# Altium PCB MOASCT.PcbDoc
Units mm, origin at the board's own origin, x right, y up, seen from the top; angles counter-clockwise.
Board outline 85.6 x 53.98 mm, 2 copper layers (Top Layer, Bottom Layer); 55 components, 42 nets, 166 pads, 430 vias.
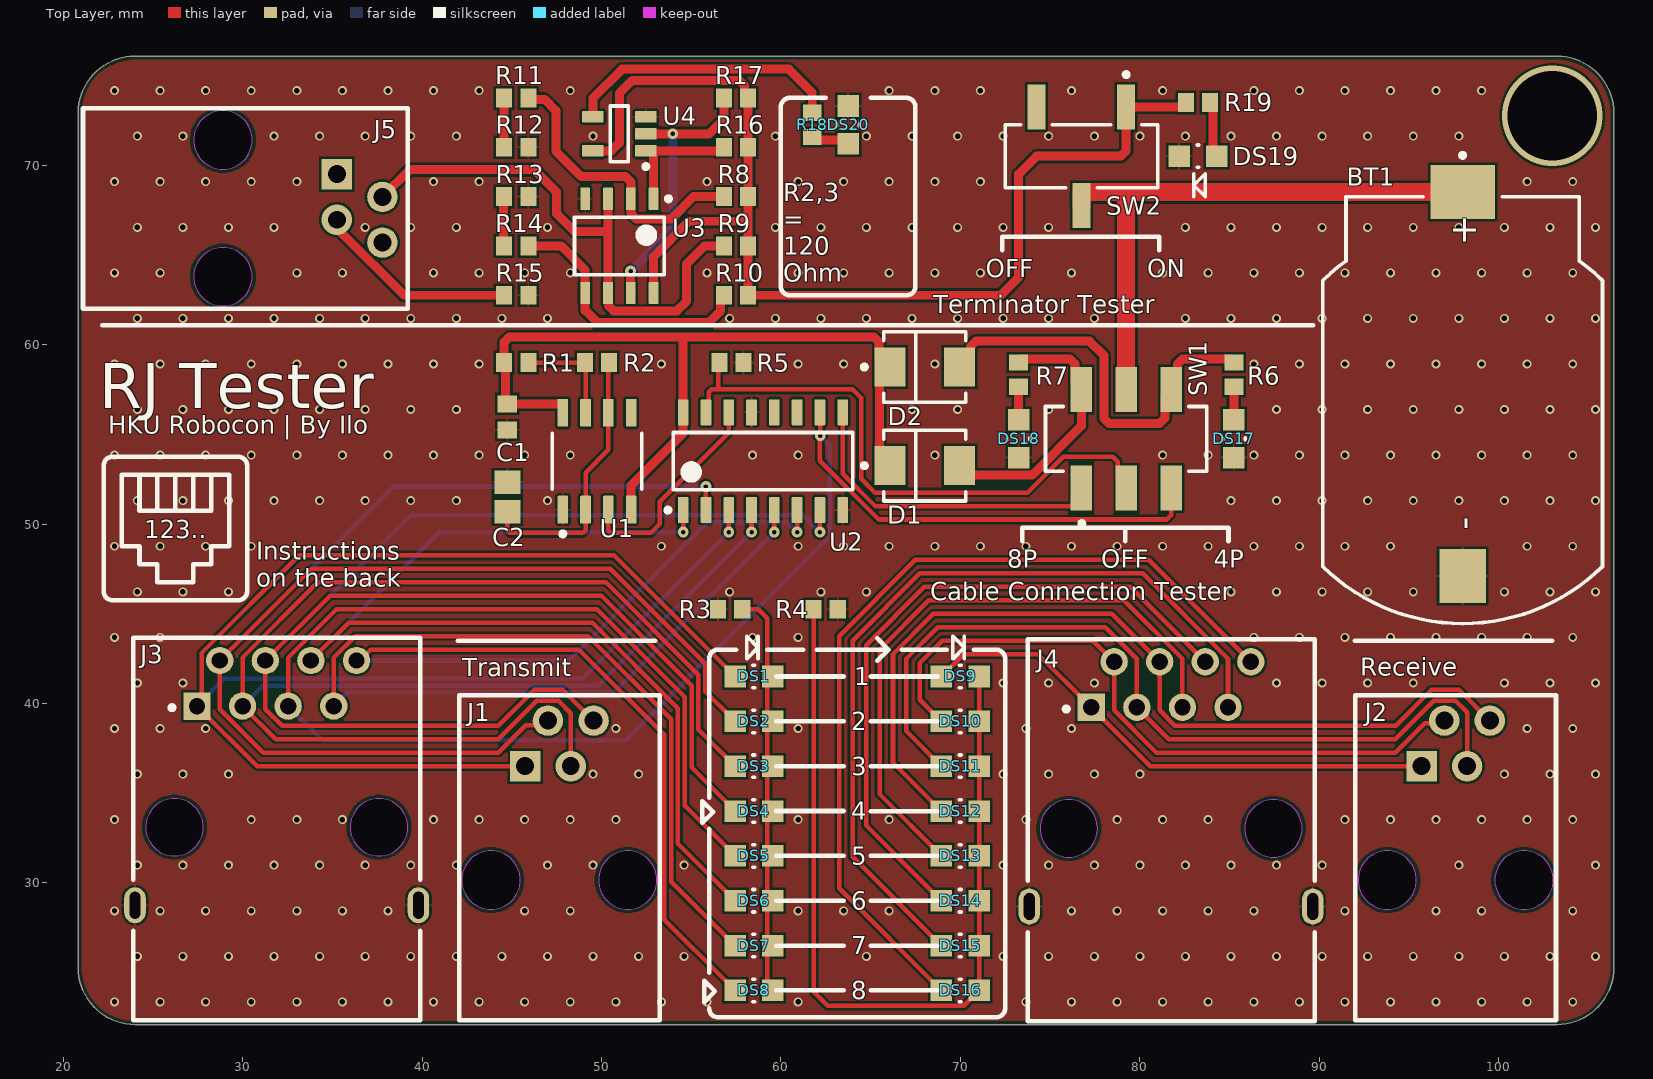
[diagram p0: Top Layer view]
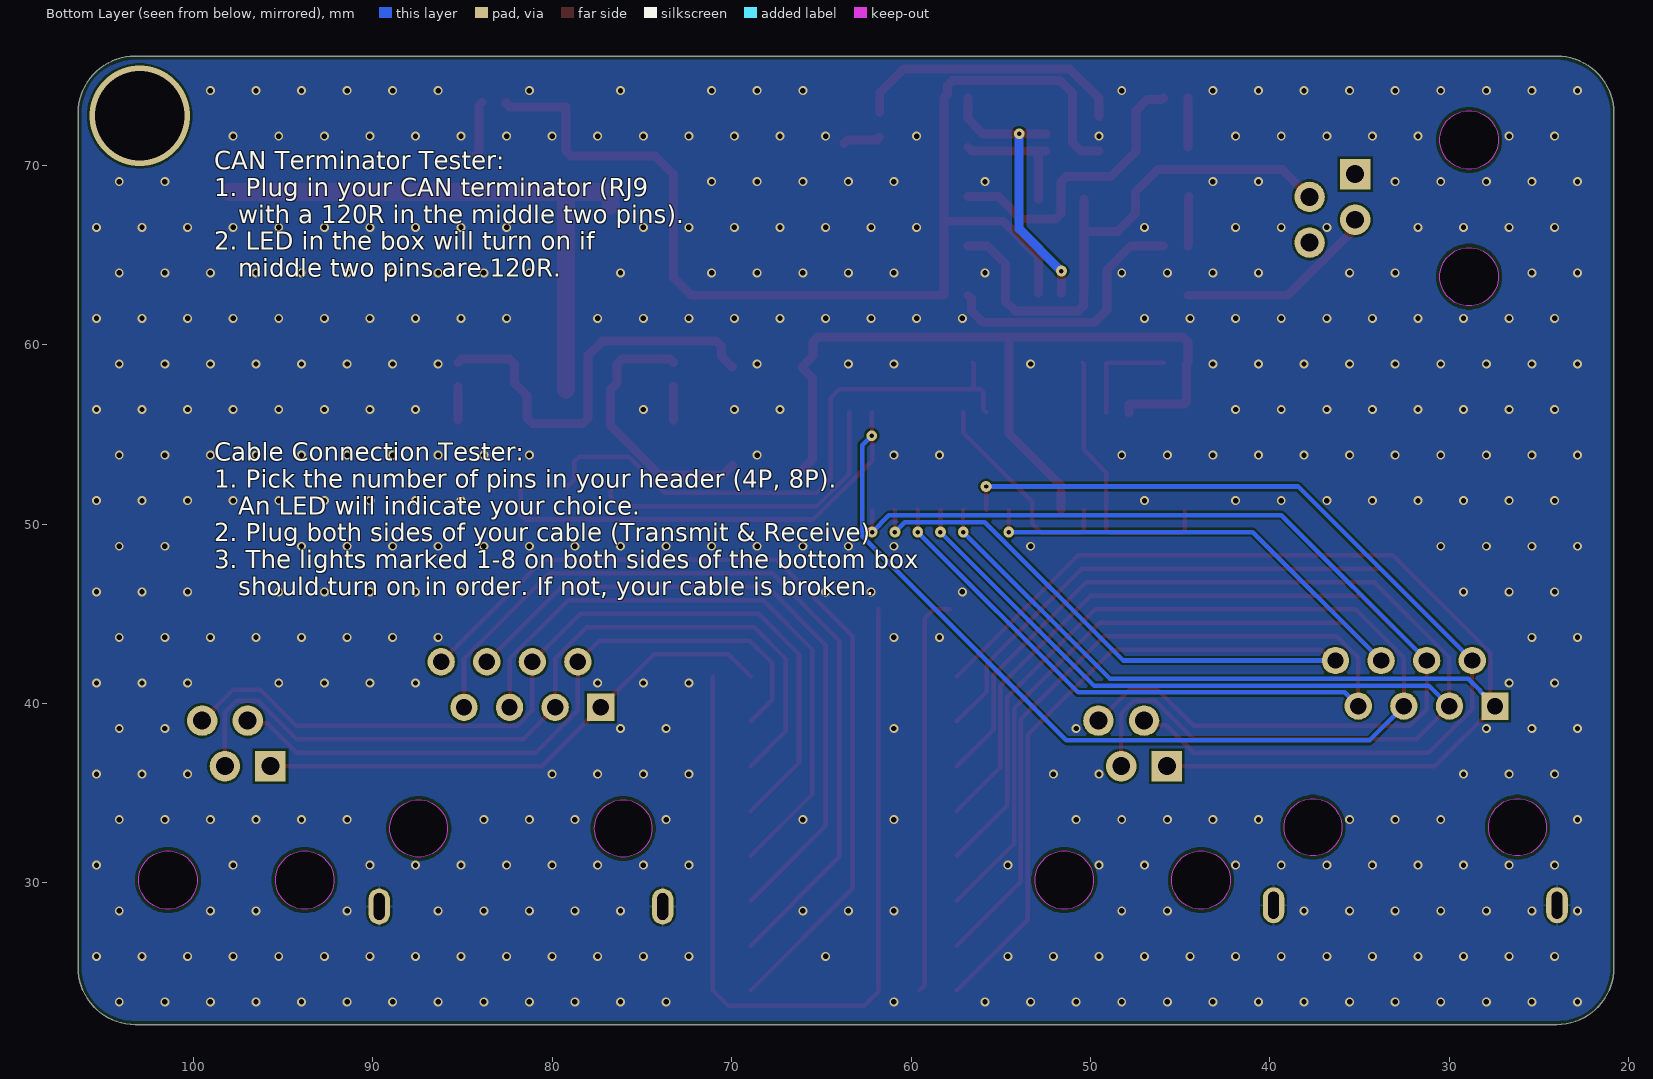
[diagram p1: Bottom Layer view, seen from below]

## Layer stack, top to bottom
Top Solder: solder mask 0.0102, Solder Resist, Dk 3.5
Top Layer: signal copper 0.0356
Dielectric 1: dielectric 0.32, FR-4, Dk 4.8
Bottom Layer: signal copper 0.0356
Bottom Solder: solder mask 0.0102, Solder Resist, Dk 3.5

## Board outline
20.831,25.278 20.831,72.898 cw(c24.011,72.898) 24.011,76.078 103.251,76.078 cw(c103.251,72.898) 106.431,72.898 106.431,25.278 cw(c103.251,25.278) 103.251,22.098 24.011,22.098 cw(c24.011,25.278)

## Design rules (kind name [scope] priority, off if disabled: settings)
BoardOutlineClearance [All] p1: gap=0.2 ignorepadtopadclearanceinfootprint=FALSE
Clearance [All] p1: gap=0.127 ignorepadtopadclearanceinfootprint=FALSE except(0.25: Arc-Hole Track-Hole SMDPad-Hole THPad-Hole Via-Hole Fill-Hole Poly-Hole Region-Hole Text-Hole)
ComponentClearance [All] p1: gap=0.127 collisioncheckmode=3 verticalgap=0.127 showdistances=TRUE
DiffPairsRouting [All] p1: maxlimit=0.254 minlimit=0.127 mostfreqgap=0.127 toplayer_minwidth=0.127 toplayer_maxwidth=25.4 toplayer_prefwidth=0.127 bottomlayer_minwidth=0.127 bottomlayer_maxwidth=25.4 bottomlayer_prefwidth=0.127 maxuncoupledlength=12.7
Height [All] p1: minheight=0 maxheight=1816.048 prefheight=12.7
HoleSize [All] p1: absolutevalues=TRUE maxlimit=6.3 minlimit=0.3 maxpercent=80.000 minpercent=20.000
HoleToHoleClearance [All] p1: gap=0.25 allowstackedmicrovias=FALSE
MinimumAnnularRing [All] p1: minimumring=0.076
MinimumSolderMaskSliver [All] p1: minsoldermaskwidth=0
PlaneClearance [All] p1: clearance=0.127
PlaneConnect PlaneConnectPowerPads [InPadClass('PowerPads')] p1: planeconnectstyle=Direct reliefexpansion=0.508 reliefentries=4 reliefconductorwidth=0.254 reliefairgap=0.254
PlaneConnect [All] p2: pad.planeconnectstyle=Relief pad.reliefexpansion=0.3 pad.reliefentries=4 pad.reliefconductorwidth=0.127 pad.reliefairgap=0.127 via.planeconnectstyle=Direct via.reliefexpansion=0.3 via.reliefentries=4 via.reliefconductorwidth=0.127 via.reliefairgap=0.127
PolygonConnect PolygonConnectPowerPads [All vs (InPadClass('PowerPads'))] p1: connectstyle=Direct reliefconductorwidth=0.254 reliefentries=4 polygonreliefangle="90 Angle" airgapwidth=0.254
PolygonConnect [All] p2: thpad.connectstyle=Relief thpad.reliefconductorwidth=0.127 thpad.reliefentries=4 thpad.polygonreliefangle="90 Angle" thpad.airgapwidth=0.127 smdpad.connectstyle=Relief smdpad.reliefconductorwidth=0.127 smdpad.reliefentries=4 smdpad.polygonreliefangle="90 Angle" smdpad.airgapwidth=0.127 via.connectstyle=Direct via.reliefconductorwidth=0.127 via.reliefentries=4 via.polygonreliefangle="90 Angle" via.airgapwidth=0.127
RoutingVias [All] p1: holewidth=0.3 width=0.6 viastyle="Through Hole" minholewidth=0.3 minwidth=0.6 maxholewidth=0.6 maxwidth=6.6
SilkToSilkClearance [All] p1: silktosilkclearance=0
SilkToSolderMaskClearance [IsPad] p1: minsilkscreentomaskgap=0.127 clearancetoexposedcopper=TRUE
SolderMaskExpansion [All] p1: expansion=0.075 istentingtop=FALSE
Width [All] p1: maxlimit=25.4 minlimit=0.127 preferedwidth=0.127 minimp=50.000000 maximp=50.000000 favimp=50.000000
20 further rules are at their usual default settings.

## Components (designator, comment, footprint, x,y, rotation, side; value= is the part's Value field where it differs from the comment)
BT1 "S8421-45R" HRWN-S8421-45R_V 98,55.6 r180 top
C1 "100nF" CAPC1608X92X38ML15T08 44.75,55.975 r90 top
C2 "47uF" CAPC2013X145X48NL20T23 44.75,51.5 r90 top
D1 "SS24" FP-95401-MFG 68.027,53.25 r0 top
D2 "SS24" FP-95401-MFG 68.027,58.75 r0 top
DS1 "SML-LXT0805IW-TR" LUMX-SML-LXT0805_V 58.5,41.5 r0 top
DS2 "SML-LXT0805IW-TR" LUMX-SML-LXT0805_V 58.5,39 r0 top
DS3 "SML-LXT0805IW-TR" LUMX-SML-LXT0805_V 58.5,36.5 r0 top
DS4 "SML-LXT0805IW-TR" LUMX-SML-LXT0805_V 58.5,34 r0 top
DS5 "SML-LXT0805IW-TR" LUMX-SML-LXT0805_V 58.5,31.5 r0 top
DS6 "SML-LXT0805IW-TR" LUMX-SML-LXT0805_V 58.5,29 r0 top
DS7 "SML-LXT0805IW-TR" LUMX-SML-LXT0805_V 58.5,26.5 r0 top
DS8 "SML-LXT0805IW-TR" LUMX-SML-LXT0805_V 58.5,24 r0 top
DS9 "SML-LXT0805IW-TR" LUMX-SML-LXT0805_V 70,41.5 r0 top
DS10 "SML-LXT0805IW-TR" LUMX-SML-LXT0805_V 70,39 r0 top
DS11 "SML-LXT0805IW-TR" LUMX-SML-LXT0805_V 70,36.5 r0 top
DS12 "SML-LXT0805IW-TR" LUMX-SML-LXT0805_V 70,34 r0 top
DS13 "SML-LXT0805IW-TR" LUMX-SML-LXT0805_V 70,31.5 r0 top
DS14 "SML-LXT0805IW-TR" LUMX-SML-LXT0805_V 70,29 r0 top
DS15 "SML-LXT0805IW-TR" LUMX-SML-LXT0805_V 70,26.5 r0 top
DS16 "SML-LXT0805IW-TR" LUMX-SML-LXT0805_V 70,24 r0 top
DS17 "SML-LXT0805IW-TR" LUMX-SML-LXT0805_V 85.25,54.75 r270 top
DS18 "SML-LXT0805IW-TR" LUMX-SML-LXT0805_V 73.25,54.75 r270 top
DS19 "SML-LXT0805IW-TR" LUMX-SML-LXT0805_V 83.25,70.5 r180 top
DS20 "SML-LXT0805IW-TR" LUMX-SML-LXT0805_V 63.75,72.25 r90 top
J1 "955012441" RJ45-TH_95501-2441 47.655,37.77 r0 top
J2 "955012441" RJ45-TH_95501-2441 97.615,37.77 r0 top
J3 "KH-RJ45-59-8P8C" RJ45-TH_KINGHELM_KH-RJ45-59-8P8C 31.9,35.57 r0 top
J4 "KH-RJ45-59-8P8C" RJ45-TH_KINGHELM_KH-RJ45-59-8P8C 81.75,35.5 r0 top
J5 "955012441" RJ45-TH_95501-2441 36.52,67.595 r270 top
R1 "5k" RESC1609X50X30ML10T20 45.25,59 r180 top
R2 "5k" RESC1609X50X30ML10T20 49.75,59 r180 top
R3 "220" RESC1609X50X30ML10T20 57.175,45.25 r0 top
R4 "220" RESC1609X50X30ML10T20 62.5,45.25 r180 top
R5 "10k" RESC1609X50X30ML10T20 57.25,59 r180 top
R6 "220" RESC1609X50X30ML10T20 85.25,58.327 r90 top
R7 "220" RESC1609X50X30ML10T20 73.25,58.327 r90 top
R8 "22k" RESC1609X50X30ML10T20 57.5,68.25 r0 top
R9 "220" RESC1609X50X30ML10T20 57.5,65.5 r0 top
R10 "22k" RESC1609X50X30ML10T20 57.5,62.75 r0 top
R11 "10k" RESC1609X50X30ML10T20 45.25,73.75 r0 top
R12 "1.8k" RESC1609X50X30ML10T20 45.25,71 r180 top
R13 "10k" RESC1609X50X30ML10T20 45.25,65.5 r0 top
R14 "2.2k" RESC1609X50X30ML10T20 45.25,68.25 r180 top
R15 "0" RESC1609X50X30ML10T20 45.25,62.75 r180 top
R16 "10k" RESC1609X50X30ML10T20 57.5,71 r0 top
R17 "10k" RESC1609X50X30ML10T20 57.5,73.75 r0 top
R18 "220" RESC1609X50X30ML10T20 61.75,72.25 r90 top
R19 "220" RESC1609X50X30ML10T20 83.25,73.5 r180 top
SW1 "JS202011SCQN" FP-JS202011SCQN-MFG 79.25,54.75 r0 top
SW2 "JS102011SCQN" FP-JS102011SCQN-MFG 76.75,70.5 r180 top
U1 "LMC555CMX/NOPB" FP-D0008A-MFG 49.75,53.5 r90 top
U2 "CD74HC4017M" D0016A_N 59,53.5 r90 top
U3 "LM393M" D0008A_L 51,65.5 r270 top
U4 "SN74LVC1G08DBVR" DBV0005A_M 51,71.75 r180 top

## Footprints (in the part's own frame and the unit in brackets; to place one, negate y for a bottom-side part, rotate by r counter-clockwise, add the part's x,y. Pads: shape width x height; smd on the part's side, far side on the other; paste and mask are expansions set on the pad)
CAPC1608X92X38ML15T08 [mm] "Chip Capacitor, 2-Leads, Body 1.60x0.80mm, IPC Low Density"
  rect 0.95x1.1 smd: 1(-0.725,0) 2(0.725,0)
  body extent -0.87,-0.48 0.87,0.47, height 0.92
CAPC2013X145X48NL20T23 [mm] "Chip Capacitor, 2-Leads, Body 2.00x1.25mm, IPC Medium Density"
  rect 1.3x1.45 smd: 1(-0.825,0) 2(0.825,0)
  body extent -1.1,-0.72 1.1,0.72, height 1.45
D0008A_L [mm] "SOIC, 8-Leads, Body 5x4mm, Pitch 1.27mm, IPC High Density"
  rrect18% 1.25x0.55 smd: 1(-2.625,1.905) 2(-2.625,0.635) 3(-2.625,-0.635) 4(-2.625,-1.905) 5(2.625,-1.905) 6(2.625,-0.635) 7(2.625,0.635) 8(2.625,1.905)
  silkscreen extent -2.75,-2.5 1.6,2.86, body extent -3,-2.45 3,2.45, height 1.63
D0016A_N [mm] "SOIC, 16-Leads, Body 10x4mm, Pitch 1.27mm, IPC Medium Density"
  rrect17% 1.45x0.6 smd: 1(-2.725,4.445) 2(-2.725,3.175) 3(-2.725,1.905) 4(-2.725,0.635) 5(-2.725,-0.635) 6(-2.725,-1.905) 7(-2.725,-3.175) 8(-2.725,-4.445) 9(2.725,-4.445) 10(2.725,-3.175) 11(2.725,-1.905) 12(2.725,-0.635) 13(2.725,0.635) 14(2.725,1.905) 15(2.725,3.175) 16(2.725,4.445)
  silkscreen extent -2.85,-5 1.6,5.42, body extent -3,-4.95 3,4.95, height 1.59
DBV0005A_M [mm] "SOT23, 5-Leads, Body 3.05x1.75mm, Pitch 0.95mm, IPC Low Density"
  rrect15% 1.2x0.65 smd: 1(-1.475,0.95) 2(-1.475,0) 3(-1.475,-0.95) 4(1.475,-0.95) 5(1.475,0.95)
  silkscreen extent -1.6,-1.55 0.5,1.95, body extent -1.42,-1.46 1.42,1.46, height 1.08
FP-95401-MFG [mm]
  rect 1.716x2.18 smd paste+0 mask+0: 1(-1.937,0) 2(1.937,0)
  silkscreen extent -3.5,-1.97 2.28,1.97, body extent -2.9,-2.07 2.89,2.07, height 0.25
FP-D0008A-MFG [mm]
  rrect17% 1.55x0.6 smd paste+0 mask+0: 1(-2.7,1.905) 2(-2.7,0.635) 3(-2.7,-0.635) 4(-2.7,-1.905) 5(2.7,-1.905) 6(2.7,-0.635) 7(2.7,0.635) 8(2.7,1.905)
  silkscreen extent -4.17,-2.5 1.55,2.5, body extent -3.57,-2.75 3.57,2.75, height 0.25
FP-JS102011SCQN-MFG [mm]
  rect 1x2.5 smd paste+0 mask+0: 1(-2.5,-2.75) 2(0,2.75) 3(2.5,-2.75)
  silkscreen extent -4.25,-4.67 4.25,1.75, body extent -4.35,-4.1 4.35,4.1, height 0.25
FP-JS202011SCQN-MFG [mm]
  rect 1.2x2.5 smd paste+0 mask+0: 1(-2.5,-2.75) 2(0,-2.75) 3(2.5,-2.75) 4(-2.5,2.75) 5(0,2.75) 6(2.5,2.75)
  silkscreen extent -4.5,-4.85 4.5,1.8, body extent -4.6,-4.1 4.6,4.1, height 0.25
HRWN-S8421-45R_V [mm] "Holder, 2-Leads, Body 23.79x15.6mm"
  rect 3.6x3 smd: 1(0,-12.9)
  rect 2.6x3 smd: 2(0,8.5)
  silkscreen extent -7.8,-15.07 7.8,11.15, body extent -7.8,-12.64 7.8,11.15, height 5.4
LUMX-SML-LXT0805_V [mm] "SMD, 2-Leads, Body 2x1.25mm"
  rect 1.2x1.2 smd: 1(-1.05,0) 2(1.05,0)
  silkscreen extent -0.41,-0.63 0.23,2.25, body extent -1,-0.63 1,0.63, height 0.8
RESC1609X50X30ML10T20 [mm] "Chip Resistor, 2-Leads, Body 1.55x0.85mm, IPC Low Density"
  rect 0.9x1.05 smd: 1(-0.675,0) 2(0.675,0)
  body extent -0.82,-0.48 0.82,0.48, height 0.5
RJ45-TH_95501-2441 [mm]
  rect 1.7x1.7 hole 1 paste+0 mask+0.051: 1(-1.905,-1.27)
  round 1.7 hole 1 paste+0 mask+0.051: 2(-0.635,1.27) 3(0.635,-1.27) 4(1.905,1.27)
  Keep-Out Layer board cut-out: -2.185,-7.62 -2.185,-7.46 -2.247,-7.146 -2.37,-6.85 -2.548,-6.584 -2.774,-6.358 -3.04,-6.18 -3.336,-6.057 -3.65,-5.995 -3.97,-5.995 -4.284,-6.057 -4.58,-6.18 -4.846,-6.358 -5.072,-6.584 -5.25,-6.85 -5.373,-7.146 -5.435,-7.46 -5.435,-7.62 -5.435,-7.78 -5.373,-8.094 -5.25,-8.39 -5.072,-8.656 -4.846,-8.882 -4.58,-9.06 -4.284,-9.183 -3.97,-9.245 -3.65,-9.245 -3.336,-9.183 -3.04,-9.06 -2.774,-8.882 -2.548,-8.656 -2.37,-8.39 -2.247,-8.094 -2.185,-7.78 -2.185,-7.62 -2.185,-7.62
  Keep-Out Layer board cut-out: 5.435,-7.62 5.435,-7.46 5.373,-7.146 5.25,-6.85 5.072,-6.584 4.846,-6.358 4.58,-6.18 4.284,-6.057 3.97,-5.995 3.65,-5.995 3.336,-6.057 3.04,-6.18 2.774,-6.358 2.548,-6.584 2.37,-6.85 2.247,-7.146 2.185,-7.46 2.185,-7.62 2.185,-7.78 2.247,-8.094 2.37,-8.39 2.548,-8.656 2.774,-8.882 3.04,-9.06 3.336,-9.183 3.65,-9.245 3.97,-9.245 4.284,-9.183 4.58,-9.06 4.846,-8.882 5.072,-8.656 5.25,-8.39 5.373,-8.094 5.435,-7.78 5.435,-7.62 5.435,-7.62
  silkscreen extent -5.59,-15.42 5.59,2.68
RJ45-TH_KINGHELM_KH-RJ45-59-8P8C [mil]
  rect 60x60 hole 36 paste+0 mask+1.97: 1(-175,168.51)
  round 60 hole 36 paste+0 mask+1.97: 2(-125,268.51) 3(-75,168.51) 4(-25,268.5) 5(25,168.51) 6(75,268.5) 7(125,168.51) 8(175,268.5)
  oval 47.24x78.74 hole 23.62 slot 59.05 at 90 deg copper offset 0.01,0 paste+0 mask+1.97: 9(-311.03,-268.5)
  oval 47.24x78.74 hole 23.62 slot 59.06 at 90 deg paste+0 mask+1.97: 10(311.02,-268.5)
  Keep-Out Layer board cut-out: 287.4,-97.25 287.37,-91.06 284.91,-78.94 280.13,-67.53 273.23,-57.26 264.46,-48.54 254.16,-41.69 242.73,-36.97 230.6,-34.56 218.23,-34.56 206.09,-36.96 194.66,-41.68 184.36,-48.54 175.59,-57.26 168.69,-67.53 163.92,-78.94 161.45,-91.06 161.42,-97.24 161.42,-97.24 161.45,-103.43 163.91,-115.55 168.69,-126.96 175.59,-137.22 184.36,-145.95 194.66,-152.8 206.09,-157.52 218.22,-159.93 230.59,-159.93 242.73,-157.52 254.16,-152.8 264.46,-145.95 273.23,-137.23 280.13,-126.96 284.91,-115.55 287.37,-103.43 287.4,-97.25 287.4,-97.24
  Keep-Out Layer board cut-out: -161.42,-97.25 -161.45,-91.06 -163.91,-78.94 -168.69,-67.53 -175.59,-57.26 -184.36,-48.54 -194.66,-41.69 -206.09,-36.97 -218.22,-34.56 -230.59,-34.56 -242.73,-36.96 -254.16,-41.68 -264.46,-48.54 -273.23,-57.26 -280.13,-67.53 -284.9,-78.94 -287.37,-91.06 -287.4,-97.24 -287.4,-97.24 -287.37,-103.43 -284.91,-115.55 -280.13,-126.96 -273.23,-137.22 -264.46,-145.95 -254.16,-152.8 -242.73,-157.52 -230.6,-159.93 -218.23,-159.93 -206.09,-157.52 -194.66,-152.8 -184.36,-145.95 -175.59,-137.23 -168.69,-126.96 -163.91,-115.55 -161.45,-103.43 -161.42,-97.25 -161.42,-97.24
  silkscreen extent -315,-520 315,318

## Part data
BT1: library part CMP-2000-07028-1, "Bettery Coin Cell Holder, Suitable for CR2032, -40 to 105 degC, 2-Pin SMD, RoHS, Tape and Reel", Manufacturer=Harwin, Package Description="2-Pin Surface Mount Holder, Body 23.79 x 15.6 mm", Battery Cell Size=20mm, Brand=Harwin, Contact Plating=PhosphorBronze, Datasheet URL=https://cdn.harwin.com/pdfs/S8421R.pdf, Datasheet Version="Rev. 3, 01/2014", Dimensions=20mm, Factory Pack Quantity=500, Manufacturer URL=https://www.harwin.com/, Material=PolyphenyleneSulfide(PPS), Mounting Style=SMD/SMT, Mounting Technology=SurfaceMount, Number of Batteries=1, Package Reference=S8421-45R, Packaging=Reel, Product=BatteryHolders, Product Category=CoinCellBatteryHolders, RoHS=Details, Series=S8, Tradename=EZBoardware, Type=BatteryRetainer
C1: library part CMP-2006-01972-1, Manufacturer=Vitramon, Part Number=VJ0603Y103KXAAC
C2: library part CMP-2007-03168-1, Manufacturer=Vitramon, Part Number=VJ0805Y104KXAAT
D1 D2: library part CMP-00030-42277690-1, "SS24-E3/5BT Rectifier Diode, Schottky, 1 Phase, 1 Element, 2A, 40V V(RRM), Silicon, DO-214AA", Average Rectified Current=2A, Case/Package=SMB, Forward Voltage=500mV, Max Forward Surge Current (Ifsm)=75A, Max Operating Temperature=125°C, Max Repetitive Reverse Voltage (Vrrm)=40V, Max Reverse Leakage Current=400µA, Min Operating Temperature=-65°C, Contact Plating=Tin, Element Configuration=Single, Forward Current=2A, Lead Free="Lead Free", Length=4.7mm, Max Reverse Voltage (DC)=40V, Max Surge Current=75A, Mount="Surface Mount", NexarPartId=42277690, Number of Pins=2, Peak Non-Repetitive Surge Current=75A, Peak Reverse Current=400µA, Radiation Hardening=No, RoHS=Compliant, Width=3.8mm
DS1 DS2 DS3 DS4 DS5 DS6 DS7 DS8 DS9 DS10 DS11 DS12 DS13 DS14 DS15 DS16 DS17 DS18 DS19 DS20: library part CMP-1724-00002-1, "LED, RED, 635 nm, 2 V, -25 to 80 degC, 2-Pin SMD, RoHS, Tape and Reel", Case Code (Imperial)=0805, Case Code (Metric)=2012, Max Operating Temperature="80 degC", Min Operating Temperature="-25 degC", Package Quantity=1, Case\/Package=0805, ComponentLink1Description="Manufacturer URL", ComponentLink1URL=http://www.lumexinstruments.com/, ComponentLink2Description=Datasheet, ComponentLink2URL=http://www.lumex.com/content/files/ProductAttachment/219201631403-SML-LXT0805IW-TR.pdf, DatasheetVersion="Rev. F, 09/2009", Length="2 mm", Mount="Surface Mount", Mounting Technology="Surface Mount", PackageDescription="2-Pin Surface Mount Device, Body 2 x 1.25 mm", PackageReference=SML-LXT0805, Packaging="Cut Tape", REACH SVHC="No SVHC", RoHSCompliant=true, Width="1.25 mm"
J1 J2 J5: JLCPCB Part Class="Extended Part", Manufacturer=MOLEX, Ratings=-, Add into BOM=yes, Connector Type=-, Convert to PCB=yes, Datasheet=https://atta.szlcsc.com/upload/public/pdf/source/20181030/C293728_4A841B363173D905FE7362B37B2768C3.pdf, Device=955012441, LCSC Part Name=955012441, LED=-, Manufacturer Part=955012441, Number of Ports=1, Shielding=-, Supplier=LCSC, Supplier Footprint=插件, Supplier Part=C293727, Symbol=955012441
J3 J4: JLCPCB Part Class="Extended Part", LCSC Part Name="弯插 不带LED", Manufacturer=kinghelm(金航标), Operating Temperature Range=-, Add into BOM=yes, Connector Type=RJ45Receptacle, Convert to PCB=yes, Datasheet=https://atta.szlcsc.com/upload/public/pdf/source/20210106/C2683358_5AAB4F62BB451460BC65E4CF933F31C1.pdf, Device=KH-RJ45-59-8P8C, LED=不带LED, Manufacturer Part=KH-RJ45-59-8P8C, Mounting Style=Right-Angle, Number of Ports=1, Ratings=-, Shielding=有屏蔽, Supplier=LCSC, Supplier Footprint=插件, Supplier Part=C2683358, Symbol=KH-RJ45-59-8P8C
R1 R2 R3 R4 R5 R6 R7 R8 R9 R10 R11 R12 R13 R14 R15 R16 R17 R18 R19: library part CMP-2000-02920-1, Manufacturer="Vishay Dale", Part Number=CRCW060315K0FKEA
SW1: library part CMP-2000-05087-3, "SWITCH SLIDE DPDT 300MA 6V"
SW2: library part CMP-10038-000023-1, "SWITCH SLIDE SPDT 300MA 6V", Actuator Color=Black, Case/Package=SMD/SMT, Contact Resistance=70mR, Current Rating=300mA, Max Operating Temperature=85°C, Max Voltage Rating (DC)=30V, Min Operating Temperature=-40°C, Package Quantity=4000, Voltage Rating (DC)=6V, Actuator Length=2mm, Actuator Material=Nylon, Actuator Type=Standard, Contact Material="Copper Alloy", Contact Plating=Silver, Depth=7.5mm, Electrical Life=5000Cycles, Housing Material=Nylon, Length=8.5mm, Max Current Rating=300mA, Mount="Surface Mount", Orientation=Straight, Packaging="Tape and Reel", Radiation Hardening=No, RoHS Compliant=Yes, Series=JS, Switch Function=On-On, Switch Travel=2mm, Termination="Gull Wing", Throw Configuration=SPDT
U1: library part CMP-04858-000001-1, "IC OSC SINGLE TIMER 3MHZ 8-SOIC", Frequency=3MHz, Manufacturer="Texas Instruments", Max Supply Voltage=15V, Min Supply Voltage=1.5V, Nominal Supply Current=50-150uA, Package=D0008A, Temperature="-40°C to +85°C", Temperature Range High=+85°C, Temperature Range Low=-40°C, Automotive=No, Category=IC, ComponentLink2Description=Datasheet, ComponentLink2URL=http://www.ti.com/general/docs/suppproductinfo.tsp?distId=10&gotoUrl=http%3A%2F%2Fwww.ti.com%2Flit%2Fgpn%2Flmc555, Device Class L1="Integrated Circuits (ICs)", Device Class L2="Clock and Timing", Device Class L3="Timers and Oscillators", Digikey Description="IC OSC SINGLE TIMER 3MHZ 8-SOIC", Height=1.75mm, Ipc Land Pattern Name=SOIC127P600X175-8, Lead Free=Yes, Manufacturer Part Number=LMC555CMX/NOPB, Mouser Description="Timers & Support Products CMOS TIMER", Number Of Timers/Counters=1, Octopart=https://octopart.com/lmc555cmx%2Fnopb-texas+instruments-24815227, Propagation Delay=100ns, RoHS=TRUE, Standoff Height=0.11mm
U2: library part CMP-1623-00115-2, "High Speed CMOS Logic Decade Counter/Divider with 10 Decoded Outputs, D0016A, TUBE", F @ Nom Voltage(Max)(Mhz)=28, Generic Part Number=CD74HC4017, ICC @ Nom Voltage(Max)(mA)=0.08, Manufacturer="Texas Instruments", Operating Temperature Range(C)="-55 to 125", Rating=Catalog, tpd @ Nom Voltage(Max)(ns)=54, Voltage(Nom)(V)=3.3,5, Bits(#)=10, Code_JEDEC="MS-012 variation AC", DatasheetVersion=SCHS200D, Function=Counter, Input Type=LVTTL/CMOS, Inputs=1, Output Drive (IOL/IOH)(Max)(mA)=5.2/-5.2, Output Type=CMOS, PackageReference=D0016A, Schmitt Trigger=No, Technology Family=HC, Type=Decade, VCC(Max)(V)=6, VCC(Min)(V)=2
U3: library part CMP-0055-00682-3, "Low Power Low Offset Voltage Dual Comparator, 8-pin Narrow SOIC", Manufacturer="Texas Instruments", Package Reference=D0008A, PackageTopMarking=NSZXTT*LM*393M, PowerWise=N, Code_IPC=SOIC127P600-8, Code_JEDEC=MS-012-AA, ComponentLink1Description="Datasheet URL", ComponentLink1URL=http://www.ti.com/general/docs/lit/getliterature.tsp?genericPartNumber=LM393-N&fileType=pdf, CompType=Amplifiers, PackageDescription="SOIC Narrow, 4.9 x 3.9 x 1.45mm, 8 Lead, 1.27mm Pitch", PinCount=8, RoHS=N
U4: library part CMP-0859-00053-3, "Single 2-Input Positive-AND Gate, DBV0005A, LARGE T&R", F @ Nom Voltage(Max)(Mhz)=150, Generic Part Number=SN74LVC1G08, ICC @ Nom Voltage(Max)(mA)=0.01, Manufacturer="Texas Instruments", Operating Temperature Range(C)="-40 to 125,-40 to 85", Rating=Catalog, tpd @ Nom Voltage(Max)(ns)=4.5,6,4,5, Voltage(Nom)(V)=1.8,2.5,3.3,5, 3-State Output=No, Bits(#)=1, DatasheetVersion=SCES217Y, Gate Type=AND, Input Type=CMOS/TTL, Logic=True, Output Drive (IOL/IOH)(Max)(mA)=32/-32, Output Type=CMOS, PackageReference=DBV0005A, Schmitt Trigger=No, Sub-Family="AND Gate", Technology Family=LVC, VCC(Max)(V)=5.5, VCC(Min)(V)=1.65

## Via types
v1: diameter 0.5, hole 0.3, Top Layer to Bottom Layer, tented both sides, 419 vias
v2: diameter 0.6, hole 0.25, Top Layer to Bottom Layer, tented both sides, 10 vias
v3: diameter 5.6, hole 5, Top Layer to Bottom Layer, 1 vias

## Nets (pads, with @x,y where several pads share a name; then routed paths per layer and width w, separated by ;. In a path a pad name is that pad's centre, name@x,y a point inside that pad or via, vN(x,y) a via of type N, cw(c..) or ccw(c..) an arc to the next point about the centre after c; other vN are vias at no path point)
3V: BT1.1 SW1.5 SW2.2 | length 33
  Top Layer w1: SW2.2 76.75,68.5 79.25,68.5 ; SW1.5 79.25,68.5 ; BT1.1 79.25,68.5
CABL_VCC: C1.2 D1.1 D2.1 R1.2 U1.4 U1.8 U2.16 | length 46.9
  Top Layer w0.5: U1.8 47.845,56.65 47.795,56.7 C1.2 44.663,56.787 44.663,58.912 R1.2 44.575,60.132 44.868,60.425 54.555,60.425 ; U1.4 51.655,52.155 54.555,55.055 U2.16 54.555,60.425 ; D1.1@66.09,53 65.5,53.59 65.5,58.16 D2.1 65.482,59.358 65.482,60.132 65.189,60.425 54.555,60.425
Clock: U1.3 U2.14 | length 12.1
  Top Layer w0.254: U1.3 50.385,49.649 50.534,49.5 52.75,49.5 53.25,50 53.25,51.25 57.095,55.095 U2.14
GND: BT1.2 C1.1 C2.2 DS17.2 DS18.2 DS19.2 DS20.2 J3.9 J3.10 J4.9 J4.10 R3.1 R4.1 R5.1 R12.1 R14.1 R15.1 U1.1 U2.8 U2.13 U3.4 U4.3
  other v1: 22.86,23.36 25.4,23.36 27.94,23.36 30.48,23.36 33.02,23.36 35.56,23.36 38.1,23.36 40.64,23.36 43.18,23.36 45.72,23.36 48.26,23.36 50.8,23.36 53.34,23.36 55.88,23.36 60.96,23.36 73.66,23.36 76.2,23.36 78.74,23.36 81.28,23.36 83.82,23.36 86.36,23.36 88.9,23.36 91.44,23.36 93.98,23.36 96.52,23.36 99.06,23.36 101.6,23.36 104.14,23.36 24.13,25.9 26.67,25.9 29.21,25.9 31.75,25.9 34.29,25.9 36.83,25.9 39.37,25.9 41.91,25.9 44.45,25.9 46.99,25.9 49.53,25.9 52.07,25.9 54.61,25.9 64.77,25.9 72.39,25.9 74.93,25.9 77.47,25.9 80.01,25.9 82.55,25.9 85.09,25.9 87.63,25.9 90.17,25.9 92.71,25.9 95.25,25.9 97.79,25.9 100.33,25.9 102.87,25.9 105.41,25.9 22.86,28.44 25.4,28.44 27.94,28.44 30.48,28.44 33.02,28.44 35.56,28.44 38.1,28.44 45.72,28.44 48.26,28.44 60.96,28.44 63.5,28.44 66.04,28.44 76.2,28.44 78.74,28.44 81.28,28.44 83.82,28.44 86.36,28.44 91.44,28.44 96.52,28.44 99.06,28.44 104.14,28.44 24.13,30.98 26.67,30.98 29.21,30.98 31.75,30.98 34.29,30.98 36.83,30.98 39.37,30.98 41.91,30.98 46.99,30.98 49.53,30.98 54.61,30.98 72.39,30.98 74.93,30.98 77.47,30.98 80.01,30.98 82.55,30.98 85.09,30.98 87.63,30.98 90.17,30.98 97.79,30.98 105.41,30.98 22.86,33.52 30.48,33.52 33.02,33.52 35.56,33.52 40.64,33.52 43.18,33.52 45.72,33.52 48.26,33.52 50.8,33.52 60.96,33.52 66.04,33.52 73.66,33.52 78.74,33.52 81.28,33.52 83.82,33.52 91.44,33.52 93.98,33.52 96.52,33.52 99.06,33.52 101.6,33.52 104.14,33.52 24.13,36.06 26.67,36.06 29.21,36.06 49.53,36.06 52.07,36.06 72.39,36.06 74.93,36.06 77.47,36.06 80.01,36.06 100.33,36.06 102.87,36.06 105.41,36.06 22.86,38.6 25.4,38.6 27.94,38.6 50.8,38.6 60.96,38.6 73.66,38.6 76.2,38.6 101.6,38.6 104.14,38.6 24.13,41.14 26.67,41.14 72.39,41.14 74.93,41.14 77.47,41.14 87.63,41.14 90.17,41.14 92.71,41.14 95.25,41.14 100.33,41.14 102.87,41.14 105.41,41.14 22.86,43.68 25.4,43.68 58.42,43.68 60.96,43.68 86.36,43.68 88.9,43.68 91.44,43.68 93.98,43.68 96.52,43.68 99.06,43.68 101.6,43.68 104.14,43.68 24.13,46.22 26.67,46.22 29.21,46.22 57.15,46.22 62.23,46.22 64.77,46.22 85.09,46.22 87.63,46.22 90.17,46.22 92.71,46.22 95.25,46.22 100.33,46.22 102.87,46.22 105.41,46.22 22.86,48.76 25.4,48.76 27.94,48.76 30.48,48.76 53.34,48.76 60.96,48.76 63.5,48.76 66.04,48.76 68.58,48.76 71.12,48.76 73.66,48.76 76.2,48.76 78.74,48.76 81.28,48.76 83.82,48.76 86.36,48.76 88.9,48.76 91.44,48.76 93.98,48.76 101.6,48.76 104.14,48.76 24.13,51.3 26.67,51.3 29.21,51.3 31.75,51.3 34.29,51.3 36.83,51.3 39.37,51.3 41.91,51.3 46.99,51.3 85.09,51.3 87.63,51.3 90.17,51.3 92.71,51.3 95.25,51.3 97.79,51.3 100.33,51.3 102.87,51.3 105.41,51.3 22.86,53.84 25.4,53.84 27.94,53.84 30.48,53.84 33.02,53.84 35.56,53.84 38.1,53.84 40.64,53.84 43.18,53.84 45.72,53.84 48.26,53.84 58.42,53.84 60.96,53.84 68.58,53.84 81.28,53.84 83.82,53.84 86.36,53.84 88.9,53.84 91.44,53.84 93.98,53.84 96.52,53.84 99.06,53.84 101.6,53.84 104.14,53.84 24.13,56.38 26.67,56.38 29.21,56.38 31.75,56.38 34.29,56.38 36.83,56.38 39.37,56.38 41.91,56.38 67.31,56.38 69.85,56.38 74.93,56.38 87.63,56.38 90.17,56.38 92.71,56.38 95.25,56.38 97.79,56.38 100.33,56.38 102.87,56.38 105.41,56.38 22.86,58.92 25.4,58.92 27.94,58.92 30.48,58.92 33.02,58.92 35.56,58.92 38.1,58.92 40.64,58.92 43.18,58.92 53.34,58.92 60.96,58.92 63.5,58.92 68.58,58.92 86.36,58.92 88.9,58.92 91.44,58.92 93.98,58.92 96.52,58.92 99.06,58.92 101.6,58.92 104.14,58.92 24.13,61.46 26.67,61.46 29.21,61.46 31.75,61.46 34.29,61.46 36.83,61.46 39.37,61.46 41.91,61.46 44.45,61.46 46.99,61.46 57.15,61.46 59.69,61.46 62.23,61.46 64.77,61.46 67.31,61.46 69.85,61.46 72.39,61.46 74.93,61.46 77.47,61.46 82.55,61.46 85.09,61.46 87.63,61.46 90.17,61.46 92.71,61.46 95.25,61.46 97.79,61.46 100.33,61.46 102.87,61.46 105.41,61.46 22.86,64 25.4,64 33.02,64 35.56,64 40.64,64 43.18,64 45.72,64 48.26,64 55.88,64 60.96,64 63.5,64 66.04,64 68.58,64 71.12,64 76.2,64 81.28,64 83.82,64 86.36,64 88.9,64 91.44,64 93.98,64 96.52,64 99.06,64 101.6,64 104.14,64 24.13,66.54 26.67,66.54 29.21,66.54 31.75,66.54 36.83,66.54 39.37,66.54 41.91,66.54 46.99,66.54 59.69,66.54 62.23,66.54 64.77,66.54 67.31,66.54 69.85,66.54 72.39,66.54 74.93,66.54 82.55,66.54 85.09,66.54 87.63,66.54 90.17,66.54 92.71,66.54 95.25,66.54 97.79,66.54 100.33,66.54 102.87,66.54 105.41,66.54 22.86,69.08 25.4,69.08 27.94,69.08 30.48,69.08 33.02,69.08 40.64,69.08 43.18,69.08 55.88,69.08 60.96,69.08 63.5,69.08 66.04,69.08 68.58,69.08 71.12,69.08 101.6,69.08 104.14,69.08 24.13,71.62 26.67,71.62 31.75,71.62 34.29,71.62 36.83,71.62 39.37,71.62 41.91,71.62 49.53,71.62 59.69,71.62 64.77,71.62 67.31,71.62 69.85,71.62 72.39,71.62 74.93,71.62 77.47,71.62 80.01,71.62 82.55,71.62 85.09,71.62 87.63,71.62 90.17,71.62 92.71,71.62 95.25,71.62 97.79,71.62 22.86,74.16 25.4,74.16 27.94,74.16 30.48,74.16 33.02,74.16 35.56,74.16 38.1,74.16 40.64,74.16 43.18,74.16 48.26,74.16 66.04,74.16 68.58,74.16 71.12,74.16 76.2,74.16 81.28,74.16 86.36,74.16 88.9,74.16 91.44,74.16 93.98,74.16 96.52,74.16 99.06,74.16
NetC2_1: C2.1 R2.1 U1.2 U1.6 | length 15.4
  Top Layer w0.254: C2.1 44.75,49.649 44.899,49.5 48.966,49.5 49.115,49.649 49.115,52.865 50.385,54.135 U1.6 50.385,58.96 R2.1
NetD1_2: D1.2 R7.2 SW1.4 | length 15.1
  Top Layer w0.5: D1.2 70.491,52.723 74.006,52.723 76.75,55.467 SW1.4 76.4,57.85 76.4,58.907 76.107,59.2 73.448,59.2 R7.2
NetD2_2: D2.2 R6.2 SW1.6 | length 23.1
  Top Layer w0.5: D2.2 70.572,59.358 70.572,59.907 70.865,60.2 77.2,60.2 78,59.4 78,55.9 78.3,55.6 81.1,55.6 81.42,55.92 81.42,57.17 82.1,57.85 82.1,58.906 82.393,59.199 85.053,59.199 R6.2
NetDS1_1: DS1.1 J1.1 J3.1 U2.3 | length 92.4
  Top Layer w0.254: J1.1 30.805,36.5 J3.1 27.709,40.104 27.709,42.811 33.148,48.25 50.7,48.25 DS1.1 ; v2(57.095,49.55) U2.3
  Bottom Layer w0.254: J3.1 28.09,40.485 28.289,40.684 28.289,40.724 28.939,41.374 48.919,41.374 v2(57.095,49.55)
NetDS1_2: DS1.2 DS2.2 DS3.2 DS4.2 DS5.2 DS6.2 DS7.2 DS8.2 R3.2 | length 22.5
  Top Layer w0.254: R3.2 58.75,45.25 59.25,44.75 59.25,41.5 59.25,39 59.25,36.5 59.25,26.5 59.25,24.3 DS8.2
NetDS2_1: DS2.1 J1.2 J3.2 U2.2 | length 90.5
  Top Layer w0.254: J1.2 46.769,38.789 45.789,38.789 44.25,37.25 31.158,37.25 28.725,39.683 J3.2 33.835,47.5 50.5,47.5 55.786,42.214 55.786,40.664 DS2.1 ; U2.2 v2(55.825,52.09)
  Bottom Layer w0.254: J3.2 38.425,52.09 v2(55.825,52.09)
NetDS3_1: DS3.1 J1.3 J3.3 U2.4 | length 94.7
  Top Layer w0.254: J1.3 48.29,39.46 47.606,40.144 46.394,40.144 44.25,38 31.845,38 J3.3 29.995,42.557 34.188,46.75 50.25,46.75 55.405,41.595 55.405,38.545 DS3.1 ; v2(58.365,49.55) U2.4
  Bottom Layer w0.254: J3.3 31.138,40.993 49.808,40.993 v2(58.365,49.55)
NetDS4_1: DS4.1 J1.4 J3.4 U2.7 | length 94.1
  Top Layer w0.254: J1.4 47.85,40.75 46.25,40.75 44.25,38.75 32.198,38.75 31.265,39.683 J3.4 34.875,46 50,46 55.024,40.976 55.024,36.426 DS4.1 ; v2(62.175,49.55) U2.7
  Bottom Layer w0.254: J3.4 39.36,50.485 61.24,50.485 v2(62.175,49.55)
NetDS6_1: DS6.1 J3.6 U2.1 | length 60.3
  Top Layer w0.254: J3.6 35.915,44.5 49.5,44.5 54.262,39.738 54.262,32.188 DS6.1 ; v2(54.555,49.55) U2.1
  Bottom Layer w0.254: J3.6 40.965,49.55 v2(54.555,49.55)
NetDS7_1: DS7.1 J3.7 U2.5 | length 67.8
  Top Layer w0.254: J3.7 35.075,42.557 36.268,43.75 49.25,43.75 53.881,39.119 53.881,30.069 DS7.1 ; v2(59.635,49.55) U2.5
  Bottom Layer w0.254: J3.7 35.837,40.612 50.697,40.612 v2(59.635,49.55)
NetDS8_1: DS8.1 J3.8 U2.6 | length 64.5
  Top Layer w0.254: J3.8 36.519,42.39 37.129,43 48.75,43 53.5,38.25 53.5,27.95 56.977,24.473 DS8.1 ; v2(60.905,49.55) U2.6
  Bottom Layer w0.254: J3.8 48.178,42.39 55.892,50.104 60.351,50.104 v2(60.905,49.55)
NetDS9_1: DS9.1 J2.1 J4.1 | length 29.9
  Top Layer w0.254: DS9.1 70.2,42.75 74.335,42.75 J4.1 77.94,39.145 80.585,36.5 J2.1
NetDS9_2: DS9.2 DS10.2 DS11.2 DS12.2 DS13.2 DS14.2 DS15.2 DS16.2 R4.2 | length 48.7
  Top Layer w0.254: R4.2 61.825,23.925 62.604,23.146 70.196,23.146 DS16.2 DS15.2 DS14.2 DS13.2 DS12.2 DS11.2 DS10.2 DS9.2
NetDS10_1: DS10.1 J2.2 J4.2 | length 38.4
  Top Layer w0.254: DS10.1 67.75,40.2 67.75,42.25 69,43.5 77.395,43.5 J4.2 78.575,39.613 80.938,37.25 94.25,37.25 95.898,38.898 96.838,38.898 J2.2
NetDS11_1: DS11.1 J2.3 J4.3 | length 47.1
  Top Layer w0.254: DS11.1 67,38.45 67,42.5 68.75,44.25 78.082,44.25 79.845,42.487 J4.3 81.625,38 94.25,38 96.394,40.144 97.606,40.144 98.25,39.5 J2.3
NetDS12_1: DS12.1 J2.4 J4.4 | length 49.8
  Top Layer w0.254: DS12.1 66.25,36.7 66.25,42.75 68.5,45 78.435,45 J4.4 81.115,39.613 81.964,38.764 94.264,38.764 96.25,40.75 97.81,40.75 J2.4
NetDS13_1: DS13.1 J4.5 | length 35
  Top Layer w0.254: DS13.1 65.5,34.95 65.5,43 68.25,45.75 79.122,45.75 82.385,42.487 J4.5
NetDS14_1: DS14.1 J4.6 | length 38
  Top Layer w0.254: DS14.1 67.75,30.2 67.745,30.2 64.75,33.195 64.75,43.25 68,46.5 79.475,46.5 J4.6
NetDS15_1: DS15.1 J4.7 | length 46.2
  Top Layer w0.254: DS15.1 64,31.45 64,43.5 67.75,47.25 80.162,47.25 84.925,42.487 J4.7
NetDS16_1: DS16.1 J4.8 | length 49.2
  Top Layer w0.254: DS16.1 63.25,29.7 63.25,43.75 67.5,48 80.515,48 J4.8
NetDS17_1: DS17.1 R6.1 | length 1.9
  Top Layer w0.5: DS17.1 R6.1
NetDS18_1: DS18.1 R7.1 | length 1.9
  Top Layer w0.5: DS18.1 R7.1
NetDS19_1: DS19.1 R19.1 | length 3.2
  Top Layer w0.5: R19.1 84.1,73.325 84.1,70.7 DS19.1
NetDS20_1: DS20.1 R18.1 | length 2.2
  Top Layer w0.5: R18.1 61.925,71.4 63.55,71.4 DS20.1
NetJ5_2: J5.2 R9.1 U3.3 U3.6 | length 30.6
  Top Layer w0.5: J5.2 39.31,69.75 46.25,69.75 47.5,68.5 47.5,67.3 48.5,66.3 50.365,66.3 ; U3.3 50.365,66.3 ; R9.1 55.75,65.5 54.75,64.5 54.75,62.42 54.203,61.873 50.683,61.873 50.39,62.166 50.39,62.85 U3.6 50.365,66.3
NetJ5_3: J5.3 R15.2 | length 11.3
  Top Layer w0.5: J5.3 35.48,66.73 35.48,66.265 38.995,62.75 R15.2
NetR1_1: R1.1 R2.2 U1.7 | length 6
  Top Layer w0.254: R1.1 R2.2 49.115,58.96 U1.7
NetR8_1: R8.1 R11.2 U3.2 | length 16.5
  Top Layer w0.5: R11.2 46.007,73.668 46.832,73.668 47.461,73.039 47.461,70.789 48.885,69.365 51.342,69.365 51.635,69.072 U3.2 ; U3.2@51.66,68.125 51.66,67.293 51.953,67 53.877,67 55.127,68.25 R8.1
NetR10_1: R10.1 R13.2 U3.5 | length 15
  Top Layer w0.5: R13.2 47.75,65.5 49.095,64.155 U3.5 49.095,61.905 49.754,61.246 55.996,61.246 56.645,61.895 56.645,62.57 R10.1
NetR11_1: R11.1 R12.2 | length 2.7
  Top Layer w0.5: R12.2 R11.1
NetR13_1: R13.1 R14.2 | length 2.8
  Top Layer w0.5: R14.2@44.5,68.25 44.538,68.213 44.538,65.538 R13.1
NetR16_1: R16.1 U3.1 U4.1 | length 7.4
  Top Layer w0.5: U3.1 52.905,70.645 52.75,70.8 U4.1 56.625,70.8 R16.1
NetR17_1: R17.1 U3.7 U4.2 | length 15.7
  Top Layer w0.5: v2(51.625,64.1) 51.63,64.095 51.63,62.88 U3.7 ; U4.2 56,71.75 56.825,72.575 R17.1
  Bottom Layer w0.5: v2(51.625,64.1) 53.975,66.45 v2(53.975,71.755)
NetR18_2: R18.2 U4.4 | length 15.6
  Top Layer w0.5: U4.4 49.525,73.725 51.15,75.35 60.45,75.35 61.75,74.05 R18.2
PIN_4_RESET: DS5.1 J3.5 SW1.3 U2.10 | length 104.8
  Top Layer w0.254: J3.5 32.535,42.557 35.228,45.25 49.75,45.25 54.643,40.357 54.643,34.307 DS5.1 ; U2.10 62.187,56.212 62.187,54.938 v2(62.2,54.925) 62.175,54.9 62.175,53.53 65.455,50.25 81.5,50.25 81.75,50.5 SW1.3
  Bottom Layer w0.254: J3.5 34.449,37.936 51.344,37.936 62.729,49.321 62.729,54.396 v2(62.2,54.925)
PIN_8_RESET: SW1.1 U2.9 | length 18.2
  Top Layer w0.254: U2.9 63.445,52.805 65.25,51 76.277,51 76.75,51.473 SW1.1
Reset: R5.2 SW1.2 U2.15 | length 33.2
  Top Layer w0.254: U2.15 55.98,56.38 55.98,57.351 56.129,57.5 56.5,57.5 ; R5.2 56.5,58.925 56.5,57.5 ; SW1.2 78.777,52.473 78.777,53.473 78.5,53.75 75.746,53.75 73.746,51.75 65.25,51.75 64.474,52.526 64.474,57.026 64,57.5 56.5,57.5
TERM_VCC: R8.2 R9.2 R10.2 R16.2 R17.2 R19.2 SW2.1 U3.8 U4.5 | length 65.4
  Top Layer w0.5: U4.5 50.55,70.8 51,71.25 51,74 51.723,74.723 57.682,74.723 57.975,74.43 57.975,73.95 R17.2 R16.2 R8.2 58.175,66.875 ; U3.8 52.905,64.905 54.875,66.875 58.175,66.875 ; R19.2 82.575,73.45 82.375,73.25 SW2.1 79.25,70.793 78.957,70.5 74.25,70.5 73.25,69.5 73.25,63.75 72.25,62.75 R10.2 R9.2 58.175,66.875
pads on no net: J5.1 J5.4 SW2.3 U1.5 U2.11 U2.12
copper on no net:
  other v3: 103,72.75

## Polygon pours and split planes (outlines as drawn)
GND on Top Layer "GND_L01_P000" (solid, pour order 0): 20.831,25.278 20.831,72.898 cw(c24.011,72.898) 24.011,76.078 103.251,76.078 cw(c103.251,72.898) 106.431,72.898 106.431,25.278 cw(c103.251,25.278) 103.251,22.098 24.011,22.098 cw(c24.011,25.278)
GND on Bottom Layer "GND_L02_P003" (solid, pour order 3): 20.831,25.278 20.831,72.898 cw(c24.011,72.898) 24.011,76.078 103.251,76.078 cw(c103.251,72.898) 106.431,72.898 106.431,25.278 cw(c103.251,25.278) 103.251,22.098 24.011,22.098 cw(c24.011,25.278)

## Silkscreen, mask and mechanical layers (free items; w line width, h text height)
Top Overlay:
  lines w0.254: 22.175,61.075 89.675,61.075 ; 24.25,52.75 24.25,50.75 28.25,50.75 28.25,52.75 ; 25.25,50.75 25.25,52.75 ; 26.25,50.75 26.25,52.75 ; 27.25,50.75 27.25,52.75 ; 42,43.5 53,43.5 ; 56,23 ccw(c56.5,23) 56.5,22.5 72,22.5 ccw(c72,23) 72.5,23 72.5,42.5 ccw(c72,42.5) 72,43 70.75,43 ; 56,25 56,33 ; 56,34.75 56,42.5 cw(c56.5,42.5) 56.5,43 57.5,43 ; 59.25,43 61.25,43 ; 59.75,24.001 63.5,24.001 ; 59.75,26.501 63.5,26.501 ; 59.75,29 63.5,29 ; 59.75,31.5 63.5,31.5 ; 59.75,34.001 63.5,34.001 ; 59.75,36.501 63.5,36.501 ; 59.75,39 63.5,39 ; 59.75,41.5 63.5,41.5 ; 62,43 65.75,43 ; 62.5,73.75 60.5,73.75 ccw(c60.5,73.25) 60,73.25 60,63.25 ccw(c60.5,63.25) 60.5,62.75 67,62.75 ccw(c67,63.25) 67.5,63.25 67.5,73.25 ccw(c67,73.25) 67,73.75 65,73.75 ; 65,24 68.75,24 ; 65,26.5 68.75,26.5 ; 65,28.999 68.75,28.999 ; 65,31.499 68.75,31.499 ; 65,34 68.75,34 ; 65,36.5 68.75,36.5 ; 65,38.999 68.75,38.999 ; 65,41.499 68.75,41.499 ; 65.375,42.375 66,43 65.375,43.625 ; 66.75,43 69.25,43 ; 72.35,65.25 72.35,66 81.1,66 81.1,65.25 ; 73.45,49.05 73.45,49.8 84.95,49.8 84.95,49.05 ; 79.2,49.05 79.2,49.8 ; 92,43.5 103,43.5 ; 22.25,46.25 ccw(c22.75,46.25) 22.75,45.75 29.75,45.75 ccw(c29.75,46.25) 30.25,46.25 30.25,53.25 ccw(c29.75,53.25) 29.75,53.75 22.75,53.75 ccw(c22.75,53.25) 22.25,53.25 22.25,46.25 ; 23.25,48.75 23.25,52.75 29.25,52.75 29.25,48.75 28.25,48.75 28.25,47.75 27.25,47.75 27.25,46.75 25.25,46.75 25.25,47.75 24.25,47.75 24.25,48.75 23.25,48.75 ; 55.627,33.35 56.227,33.95 55.627,34.55 55.627,33.35 ; 55.727,23.35 56.327,23.95 55.727,24.55 55.727,23.35
  text "OFF" at 71.417,63.754 h1
  text "ON" at 80.417,63.754 h1
  text "R2,3 / = / 120 / Ohm" at 60.125,63.5 h1
  text "Terminator Tester" at 68.503,61.754 h1
  text "RJ Tester" at 22,56.45 h2.5
  text "HKU Robocon | By Ilo" at 22.504,55.037 h1
  text "123.." at 24.508,49.204 h1
  text "8P" at 72.617,47.554 h1
  text "OFF" at 77.867,47.554 h1
  text "4P" at 84.117,47.554 h1
  text "Instructions  / on the back" at 30.75,46.5 h1
  text "Cable Connection Tester" at 68.337,45.754 h1
  text "Receive" at 92.304,41.554 h1
  text "Transmit" at 42.254,41.504 h1
  text "1" at 64.083,41.004 h1
  text "2" at 63.917,38.504 h1
  text "3" at 63.917,36.004 h1
  text "4" at 63.917,33.504 h1
  text "5" at 63.917,31.004 h1
  text "6" at 63.917,28.504 h1
  text "7" at 63.917,26.004 h1
  text "8" at 63.917,23.504 h1
Bottom Overlay:
  text "CAN Terminator Tester: / 1. Plug in your CAN terminator (RJ9  /    with a 120R in the middle two pins). / 2. LED in the box will turn on if  /    middle two pins are 120R." at 98.85,63.775 h1
  text "Cable Connection Tester: / 1. Pick the number of pins in your header (4P, 8P).  /    An LED will indicate your choice. / 2. Plug both sides of your cable (Transmit & Receive) / 3. The lights marked 1-8 on both sides of the bottom box  /    should turn on in order. If not, your cable is broken." at 98.85,46.025 h1
Mechanical 1:
  drawing of 372 lines, arcs and shapes, not listed

## Text inside footprints (layer, text, board x,y; h text height)
BT1: Top Overlay "+" at 98.75,65.5 h1.5 r90; Top Overlay "-" at 98.762,50.393 h1.5 r90